# Altium PCB Flow_Pump.PcbDoc (part 1 of 3)
Units mm, origin at the board's own origin, x right, y up, seen from the top; angles counter-clockwise.
Board outline 210 x 210 mm, 2 copper layers (Top Layer, Bottom Layer); 227 components, 178 nets, 654 pads, 724 vias.
Unrouted connection lines stored in the file: 221.
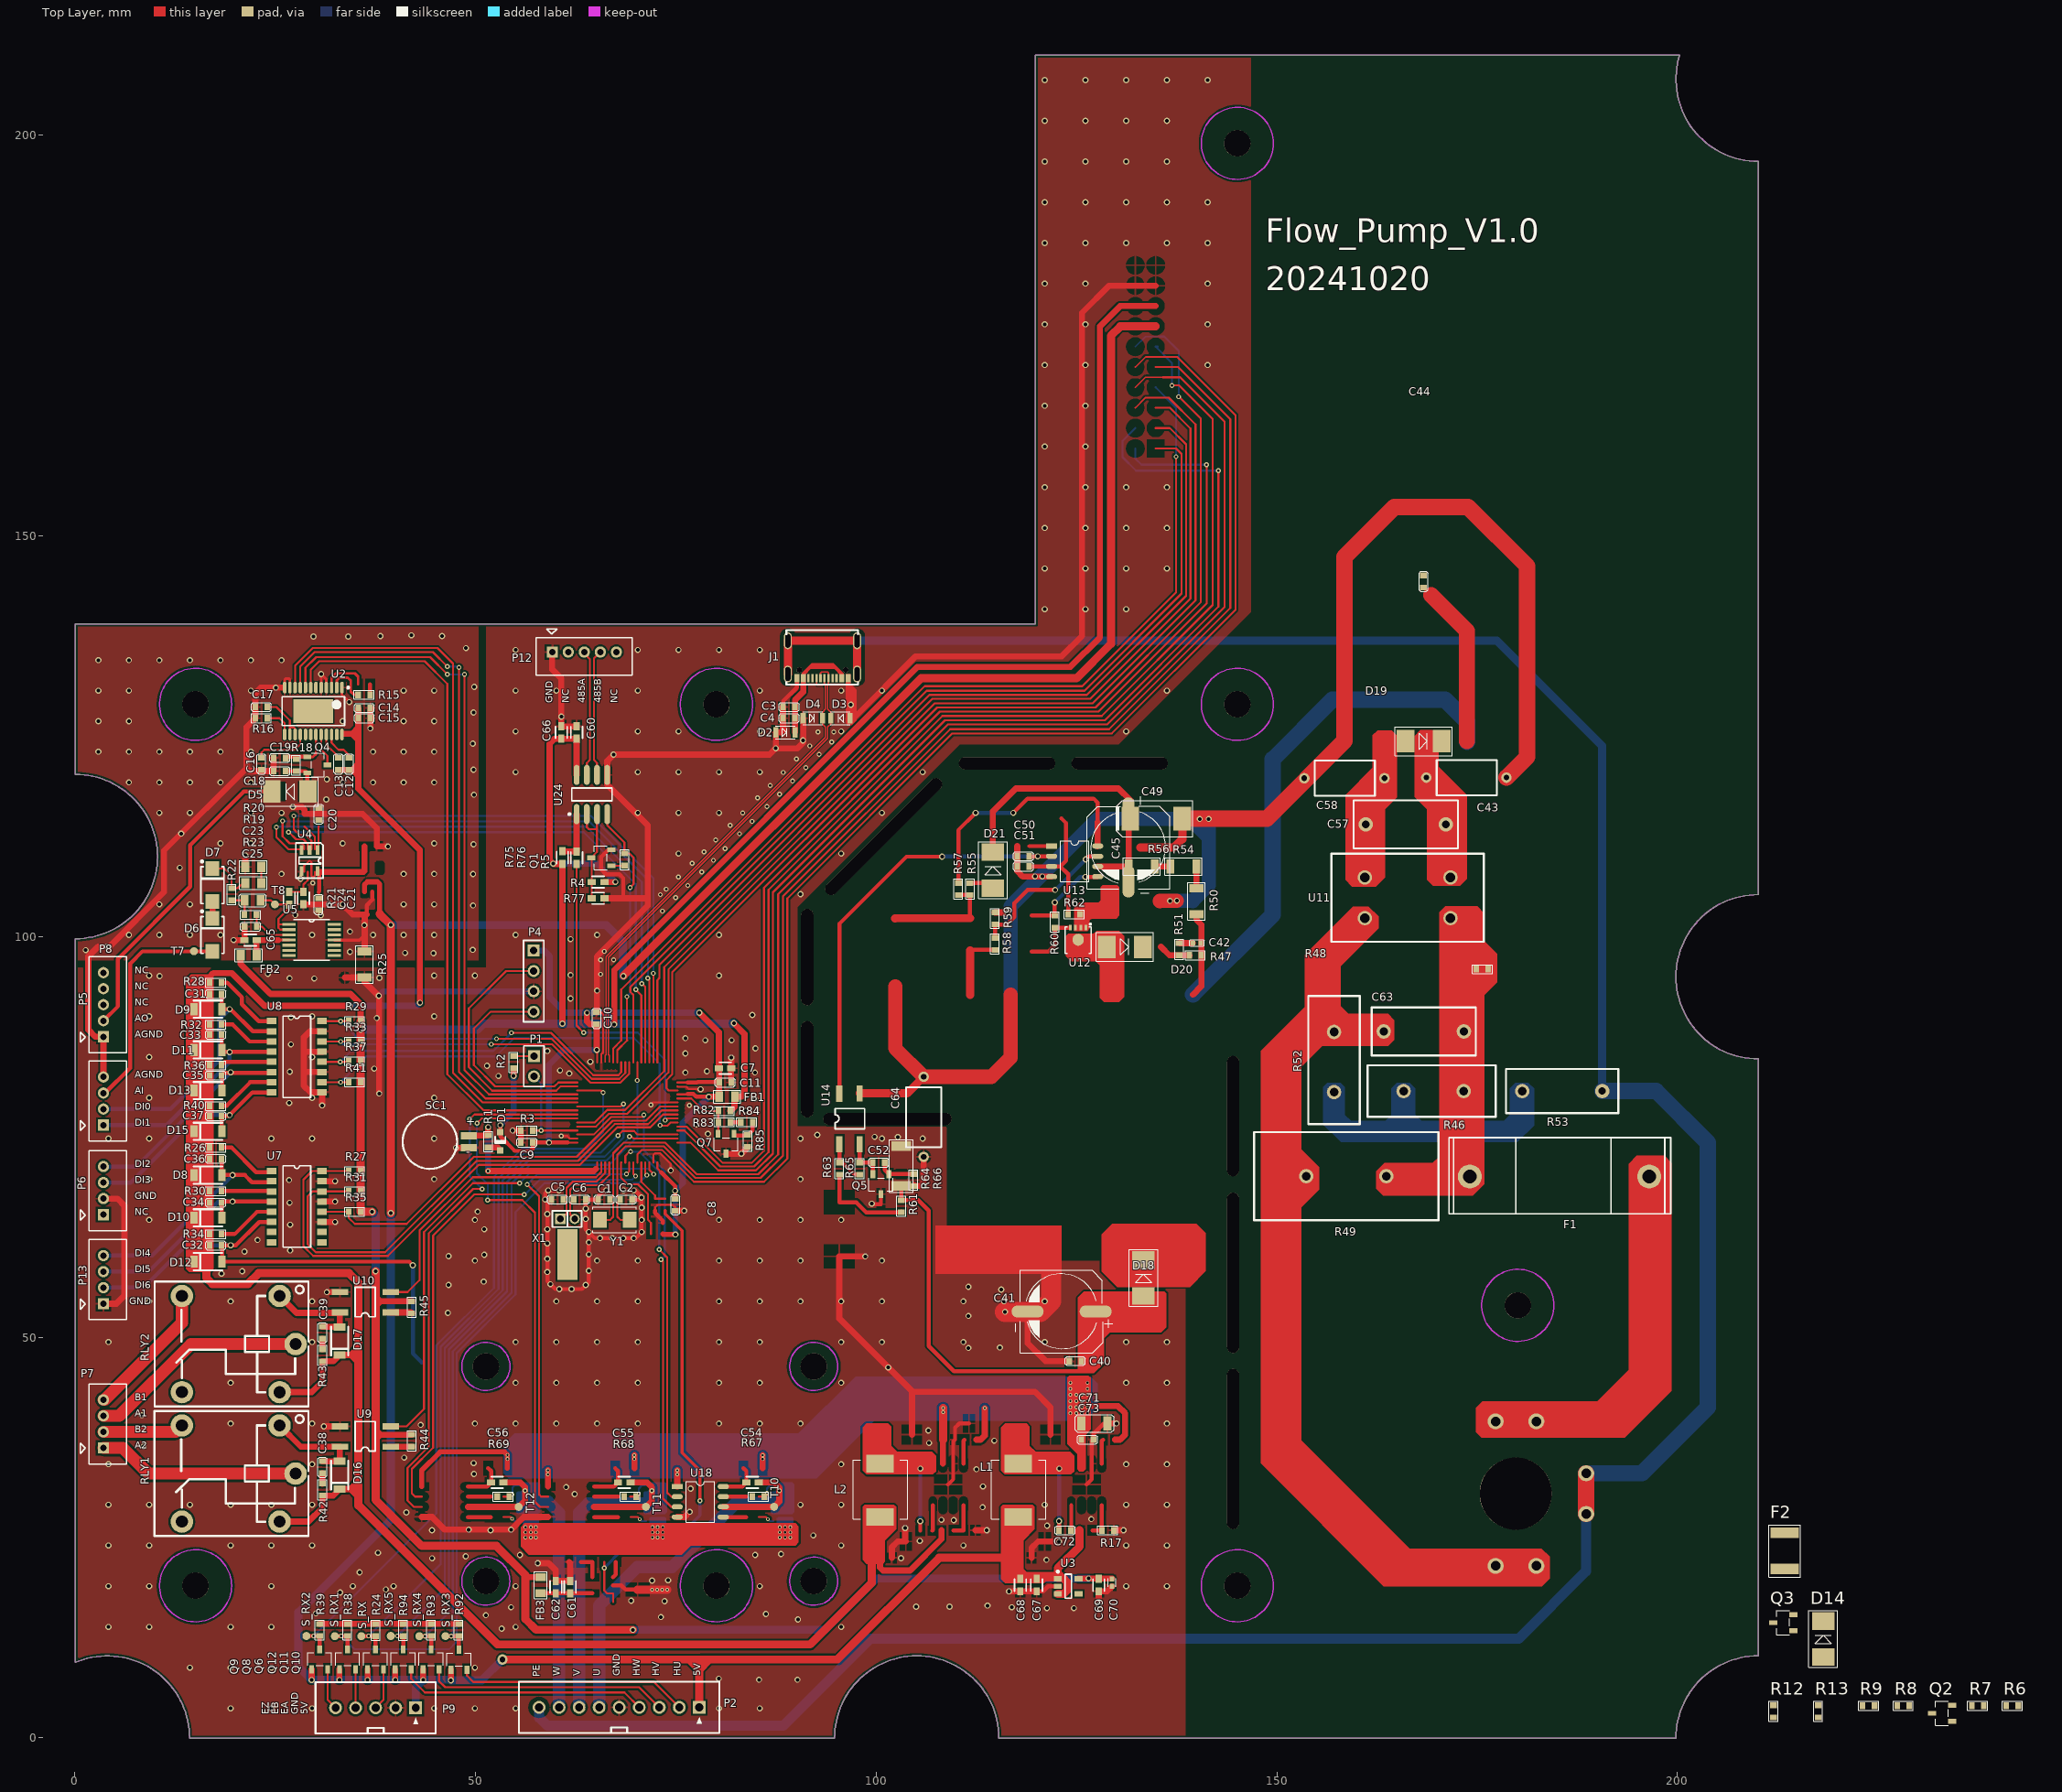
[diagram p0: Top Layer view]
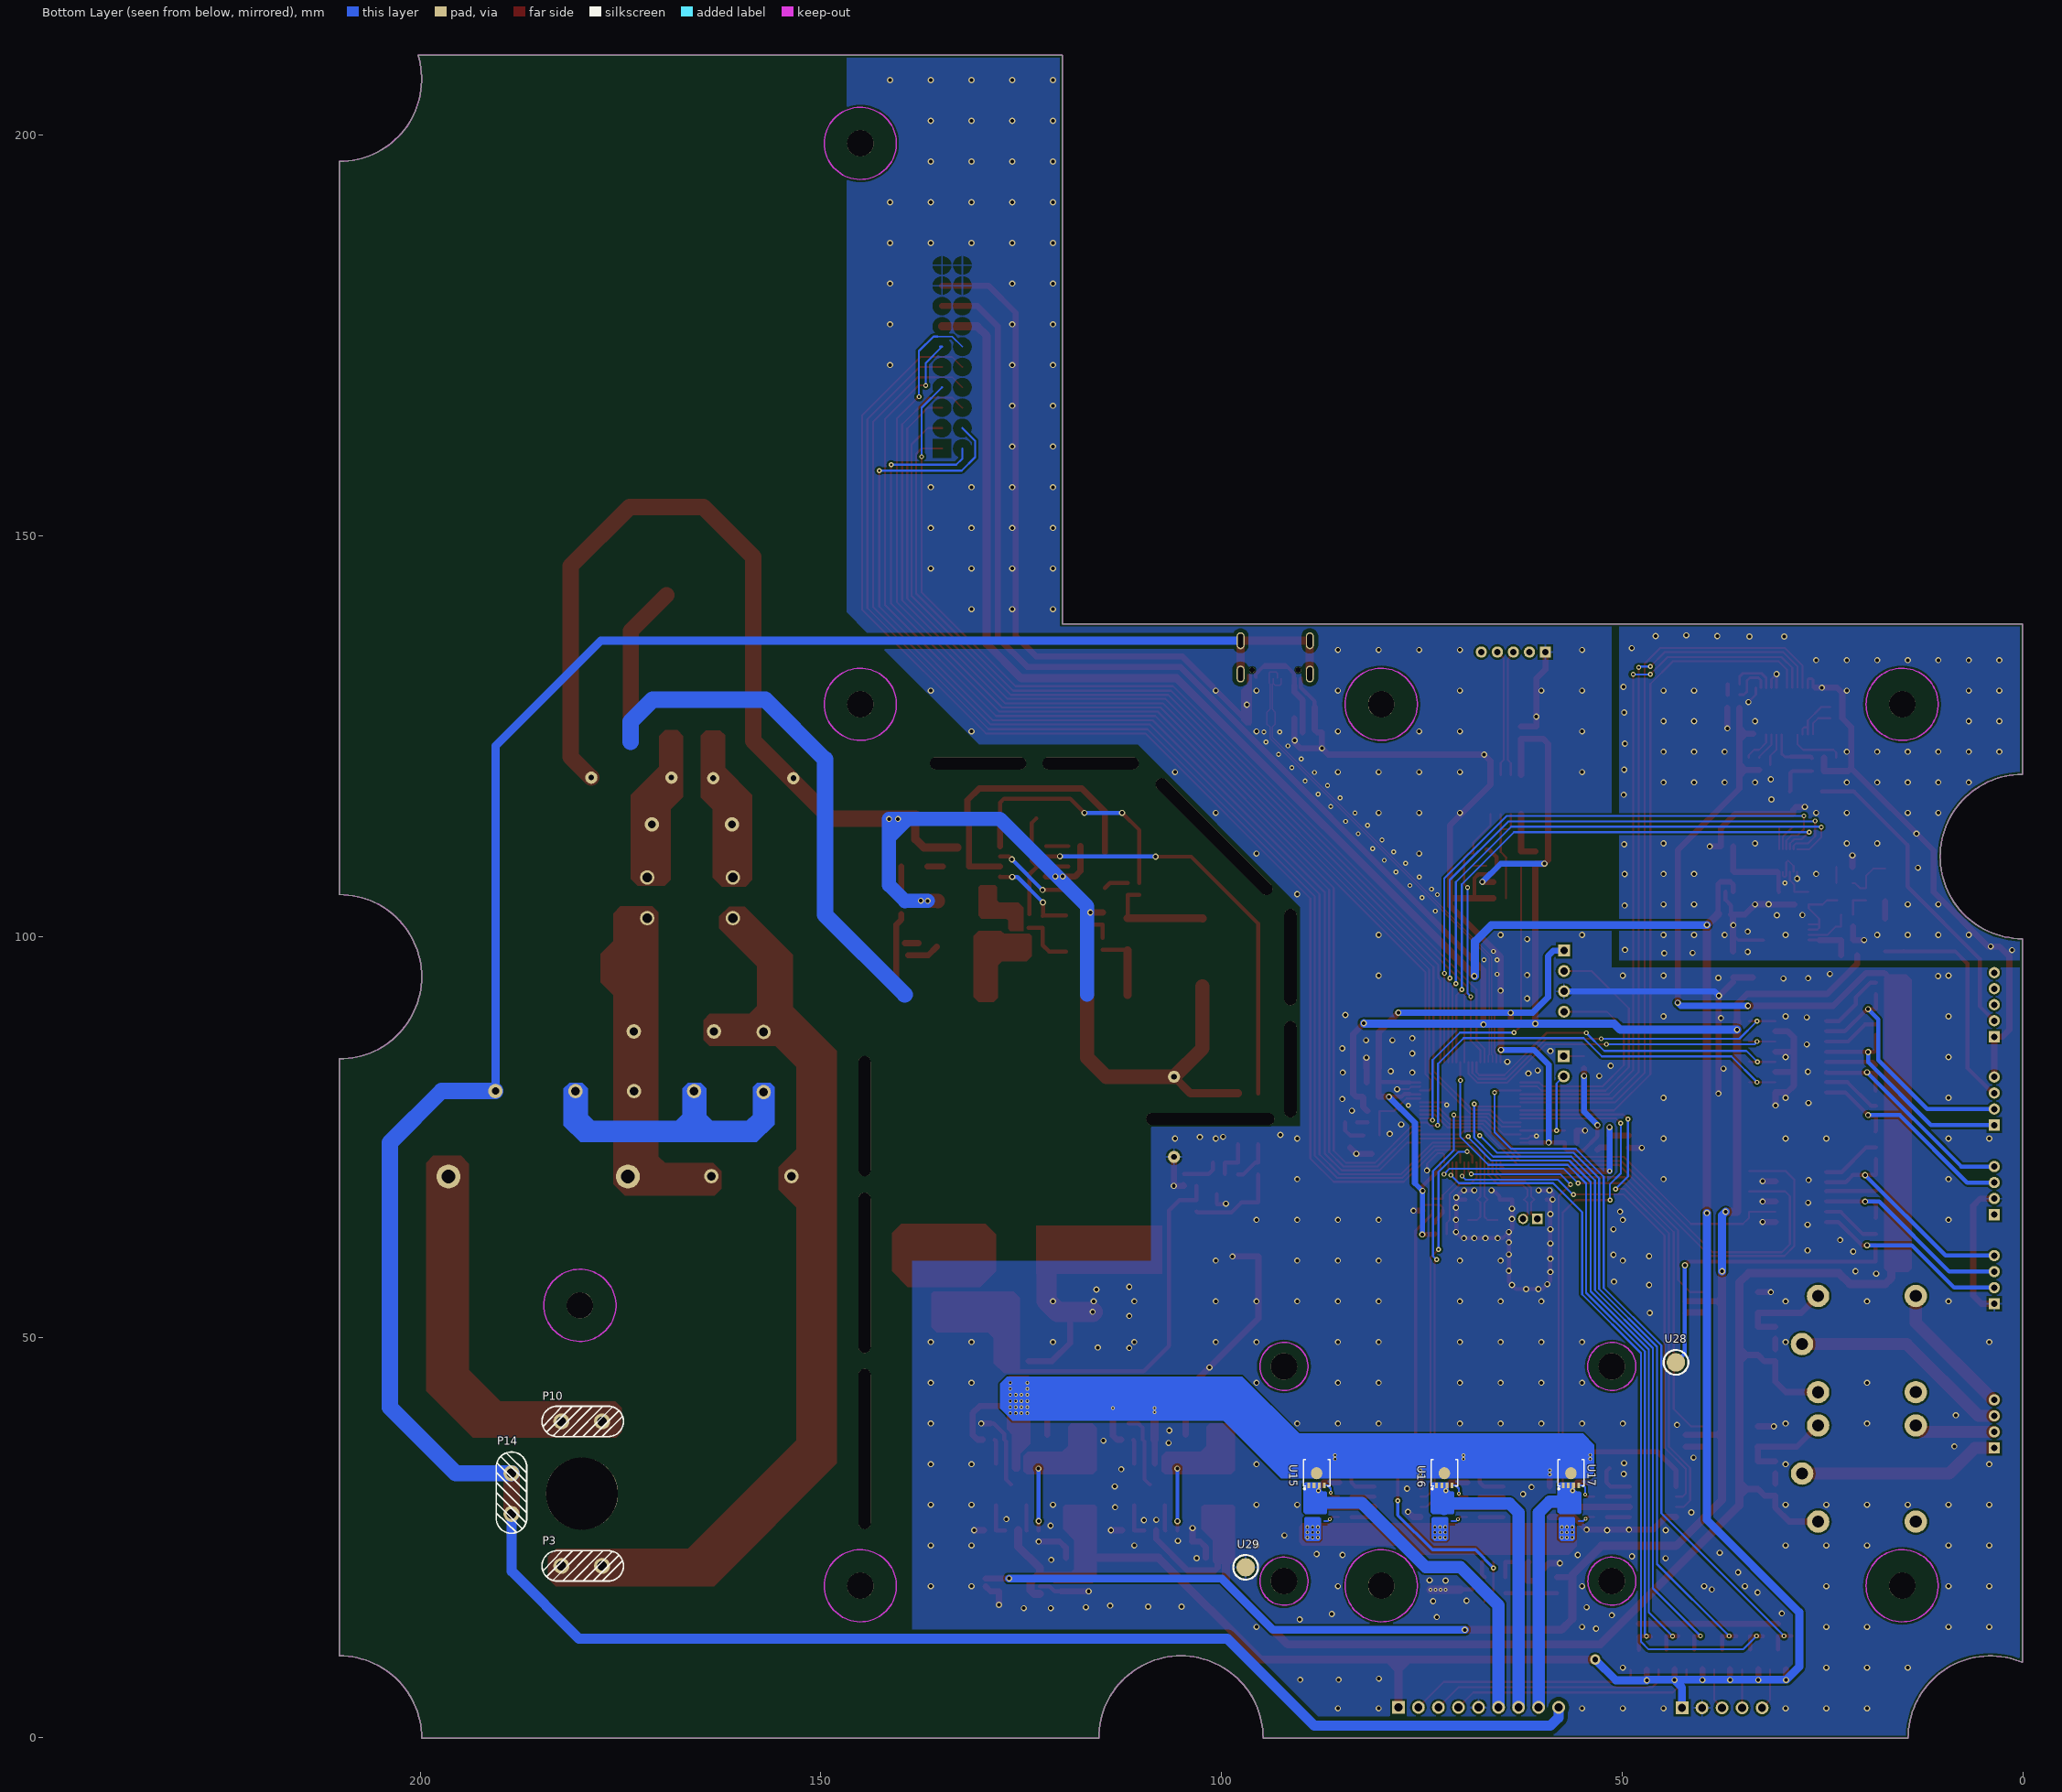
[diagram p1: Bottom Layer view, seen from below]
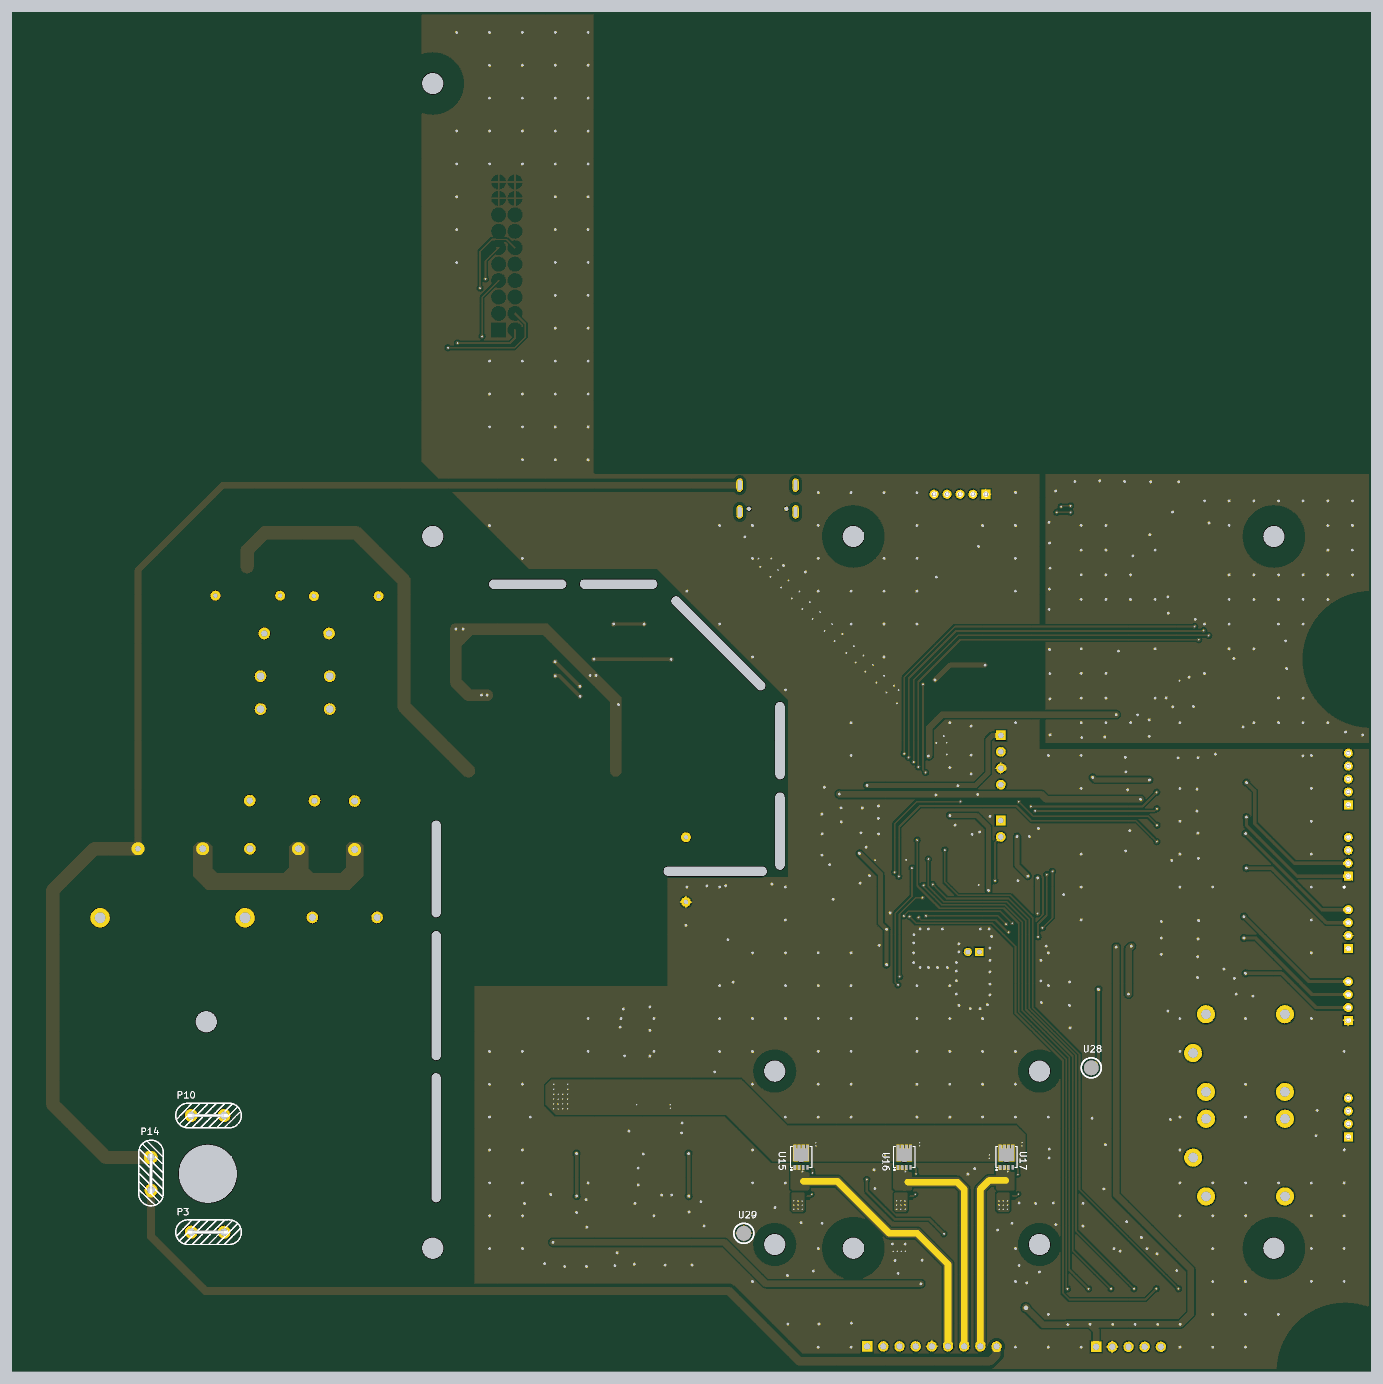
[diagram p4: 3D render of the assembled board from below, using the file's embedded part models]

## Layer stack, top to bottom
Top Solder: solder mask 0.0102, Solder Resist, Dk 3.5
Top Layer: signal copper 0.0356
Dielectric 1: dielectric 0.32, FR-4, Dk 4.8
Bottom Layer: signal copper 0.0356
Bottom Solder: solder mask 0.0102, Solder Resist, Dk 3.5

## Board outline
0.055,9.421 cw(c4.055,-0.016) 14.305,-0.016 94.805,-0.016 cw(c105.055,-0.016) 115.305,-0.016 199.805,-0.016 cw(c210.055,-0.016) 210.055,10.234 210.055,84.734 cw(c210.055,94.984) 210.055,105.234 210.055,196.746 210.055,196.734 cw(c210.055,206.984) 200.254,209.984 200.258,209.984 119.881,209.984 119.881,138.984 0.055,138.984 0.055,120.234 cw(c0.055,109.984) 0.055,99.734

## Design rules (kind name [scope] priority, off if disabled: settings)
Clearance Clearance_2 [InNet('EARTH')] p1: gap=0.508 ignorepadtopadclearanceinfootprint=FALSE except(0: Arc-Hole Track-Hole SMDPad-Hole THPad-Hole Via-Hole Fill-Hole Poly-Hole Region-Hole Text-Hole)
Clearance Clearance_1 [InDifferentialPair('USB') OR InComponent('U1') OR  InComponent('T4') OR  InComponent('U4') OR InComponent('J1') OR InComponent('U2')] p2: gap=0.152 ignorepadtopadclearanceinfootprint=FALSE except(0: Arc-Hole Track-Hole SMDPad-Hole THPad-Hole Via-Hole Fill-Hole Poly-Hole Region-Hole Text-Hole)
Clearance [All] p3: gap=0.254 ignorepadtopadclearanceinfootprint=FALSE except(0: Arc-Hole Track-Hole SMDPad-Hole THPad-Hole Via-Hole Fill-Hole Poly-Hole Region-Hole Text-Hole; 0.152: Arc-Track Track-Track)
DiffPairsRouting [All] p1: maxlimit=0.152 minlimit=0.152 mostfreqgap=0.152 toplayer_minwidth=0.152 toplayer_maxwidth=0.152 toplayer_prefwidth=0.152 bottomlayer_minwidth=0.152 bottomlayer_maxwidth=0.152 bottomlayer_prefwidth=0.152 maxuncoupledlength=12.7
PolygonConnect PolygonConnect_1 [IsVia] p1: connectstyle=Direct reliefconductorwidth=0.254 reliefentries=4 polygonreliefangle="90 Angle" airgapwidth=0.254
PolygonConnect [All] p2: connectstyle=Relief reliefconductorwidth=0.254 reliefentries=4 polygonreliefangle="90 Angle" airgapwidth=0.254
RoutingVias [All] p1: holewidth=0.711 width=1.27 viastyle="Through Hole" minholewidth=0.711 minwidth=1.27 maxholewidth=0.711 maxwidth=1.27
SolderMaskExpansion [All] p1: expansion=0.102 istentingtop=FALSE
Width [All] p1: maxlimit=3.81 minlimit=0.152 preferedwidth=0.254
29 further rules are at their usual default settings.

## Classes and differential pairs
component class ai: C13 C23 C24 C25 C65 D6 D7 FB2 R19 R20 R21 R22 R23 R25 T7 T8 U5 U12
component class ao: C12 Q2 R6 R7 R8 R9 R12 R13 U2 U4 U11
component class blds: C64 C71 C72 C73 Q5 R57 R58 R59 R60 R61 R62 R63 R64 R65 R66 R67 R68 U18
component class DI_DO: C14 C15 C16 C17 C31 C32 C33 C34 C35 C36 C37 C38 C39 C60 C66 D5 D8 D9 D10 D11 D12 D13 D14 D15 D16 D17 D18 D19 D20 D21 FB1 FB3 P5 P6 P7 P8 P12 P13 Q1 Q3 Q4 R4 R5 R15 R16 R17 R18 R26 R27 R28 R29 R30 R31 R32 R33 R34 R35 R36 R37 R40 R41 R42 R43 R44 R45 R46 R47 R48 R49 R50 R75 R76 R77 RLY1 RLY2 U7 U8 U9 U10 U13 U14 U24 U28 U29
component class mcu: C1 C2 C3 C4 C5 C6 C7 C8 C9 C10 C11 C20 C21 D1 D2 D3 D4 J1 P1 P3 P4 R1 R2 R3 R69 SC1 X1 Y1
component class power: C18 C19 C40 C41 C42 C43 C44 C45 C49 C50 C51 C52 C54 C55 C56 C57 C58 C61 C62 C63 C67 C68 C69 C70 F1 F2 L1 L2 P10 P14 Q7 R51 R52 R53 R54 R55 R56 R82 R83 R84 R85 U3 U15 U16 U17
component class sensor: P2 P9 Q6 Q8 Q9 Q10 Q11 Q12 R24 R38 R39 R92 R93 R94 S_RX S_RX1 S_RX2 S_RX3 S_RX4 S_RX5 T10 T11 T12
differential pair rs4853: +rs4853_P -rs4853_N
differential pair rs4852: +rs4852_P -rs4852_N
differential pair rs4851: +rs4851_P -rs4851_N
differential pair USB: +USB_P -USB_N

## Components (designator, comment, footprint, x,y, rotation, side; value= is the part's Value field where it differs from the comment)
C1 "20pF/25V/NC" 0603C 66.788,67.183 r180 top value=20pF/50V/NC
C2 "20pF/25V/NC" 0603C 68.049,67.183 r0 top value=20pF/50V/NC
C3 "1uF/25V" 0603C 88.362,128.651 r0 top value=1u/50V
C4 "0.1uF/50V" 0603C 88.362,127.254 r0 top
C5 "4.7pF" 0603C 60.96,67.183 r180 top value=6.8pF
C6 "4.7pF" 0603C 62.23,67.183 r0 top
C7 "Capacitor_0603" CAPC1608X092N_0603 81.153,83.566 r0 top value=10u
C8 "0.1uF/50V" 0603C 74.93,65.786 r90 top value=22nF
C9 "0.1uF/50V" 0603C 55.65,74.295 r0 top value=22nF
C10 "0.1uF/50V" 0603C 65.1,90.551 r270 top value=22nF
C11 "0.1uF/50V" 0603C 81.891,81.788 r180 top value=22nF
C12 "Capacitor_0603" 0603C 34.195,122.301 r270 top value=0.1u
C13 "Capacitor_0603" 0603C 32.884,122.301 r270 top value=0.1u
C14 "Capacitor_0603" 0603C 36.862,128.524 r180 top value=0.1u
C15 "Capacitor_0603" 0603C 36.862,127.254 r180 top value=0.1u
C16 "Capacitor_0603" 0603C 23.273,122.301 r270 top value=0.1u
C17 "Capacitor_0603" 0603C 24.011,128.651 r180 top value=0.1u
C18 "0.1uF/50V" 0603C 24.808,120.65 r0 top
C19 "47uF/25V" 0603C 24.808,122.301 r0 top
C20 "2.2uF/50V" 0603C 30.421,114.538 r90 top
C21 "0.1uF/50V" 0603C 30.403,104.775 r270 top
C23 "220nF" 0805C 21.182,104.518 r0 top
C24 "Capacitor_0603" CAPC1608X092N_0603 28.516,104.775 r270 top value=0.1u
C25 "0.1uF" 0603C 21.174,101.242 r0 top
C31 "10nF/50V" 0603C 16.804,92.837 r0 top value=22nF
C32 "10nF/50V" 0603C 16.804,61.468 r0 top value=22nF
C33 "10nF/50V" 0603C 16.804,87.757 r0 top value=22nF
C34 "10nF/50V" 0603C 16.804,66.802 r0 top value=22nF
C35 "10nF/50V" 0603C 16.804,82.677 r0 top value=22nF
C36 "10nF/50V" 0603C 16.804,72.263 r0 top value=22nF
C37 "10nF/50V" 0603C 16.804,77.597 r0 top value=22nF
C38 "0.1uF" 0603C 30.881,34.525 r270 top
C39 "0.1uF" 0603C 30.881,51.313 r270 top
C40 "0.01uF/50V" 0603c 125.577,47.027 r180 top value=0.01u/NC
C41 "0.1uF/50V" Φ10×10 123.133,53.213 r270 top
C42 "0.1uF/50V" 0402c 140.511,99.187 r180 top
C43 "1uF/50V" CAP-TH_L7.5-W4.5-P10.00-D0.6 173.634,119.837 r180 top
C44 "Capacitor_0603" 0603c 168.3,143.561 r90 top
C45 "UUD1V470MCL1GS" Φ10×10 131.469,111.125 r0 top value=220uF/50V
C49 "0.1uF/50V" 7343 131.697,114.718 r0 top
C50 "10u/50V" 0603c 119.1,110.019 r180 top
C51 "47uF/25V" 0603c 119.1,108.749 r180 top
C52 "47uF/25V" 0603c 99.566,71.792 r0 top
C54 "47uF/25V" CAPC1608X092N_0603 84.551,31.882 r180 top
C55 "0.01uF/50V" CAPC1608X092N_0603 68.535,31.882 r180 top value=0.01u/NC
C56 "0.1uF/50V" CAPC1608X092N_0603 52.7,31.882 r180 top
C57 "1uF/50V" CAP-TH_L13.0-W6.0-P10.00-D0.6 166.08,113.991 r0 top
C58 "0.1uF/50V" CAP-TH_L7.5-W4.5-P10.00-D0.6 158.42,119.761 r180 top
C60 "Capacitor_0603" CAPC1608X092N_0603 62.611,125.476 r90 top value=0.1u
C61 "10u/50V" CAPC1608X092N_0603 61.794,18.826 r90 top
C62 "0.1uF/50V" CAPC1608X092N_0603 60.016,18.826 r90 top
C63 "22u/25V" CAP-TH_L13.0-W6.0-P10.00-D0.6 168.33,88.163 r0 top
C64 "22nF/50V" CAP-TH_L7.5-W4.5-P10.00-D0.6 105.918,77.502 r90 top value=4.7pF
C65 "Capacitor_0603" CAPC1608X092N_0603 21.887,99.552 r180 top value=0.1u
C66 "Capacitor_0603" CAPC1608X092N_0603 60.706,125.476 r90 top value=0.1u
C67 "Capacitor_0603" CAPC1608X092N_0603 120.015,19.05 r270 top value=0.1u
C68 "Capacitor_0603" CAPC1608X092N_0603 117.983,19.05 r270 top value=10u
C69 "Capacitor_0603" CAPC1608X092N_0603 127.762,19.05 r270 top value=10u
C70 "Capacitor_0402" CAPC1005X056N_0402 129.413,19.381 r270 top value=0.1u
C71 "1uF/50V" 1206C 125.603,39.253 r0 top value=4.7pF
C72 "1uF/50V" 0603C 122.809,25.908 r0 top value=4.7pF
C73 "1uF/50V" 0603C 127.103,37.221 r180 top value=4.7pF
D1 "BZT52C12S-7-F" DIOD-SOD323-2_V 53.086,74.461 r270 top
D2 "CESDB5V0D3" SOD323 87.462,125.476 r0 top
D3 "CESDB5V0D3" SOD323 96.72,127.254 r180 top
D4 "CESDB5V0D3" SOD323 90.881,127.254 r0 top value=0.1uF/50V
D5 "SMBJ400CA" SMB 29.083,118.11 r180 top
D6 "SS14" DO-214AC 17.166,100.203 r90 top
D7 "SS14" DO-214AC 17.166,106.426 r90 top
D8 "LL4148" DO-213AB/LL34/MiniMELF 16.602,70.231 r0 top
D9 "LL4148" DO-213AB/LL34/MiniMELF 16.602,90.932 r0 top
D10 "LL4148" DO-213AB/LL34/MiniMELF 16.602,64.897 r0 top
D11 "LL4148" DO-213AB/LL34/MiniMELF 16.602,85.852 r0 top
D12 "LL4148" DO-213AB/LL34/MiniMELF 16.602,59.436 r0 top
D13 "LL4148" DO-213AB/LL34/MiniMELF 16.602,80.772 r0 top
D14 "SMBJ400CA" SMB 218.186,10.084 r90 top
D15 "LL4148" DO-213AB/LL34/MiniMELF 16.602,75.692 r0 top
D16 "LL4148" DO-213AB/LL34/MiniMELF 33.04,32.799 r90 top
D17 "LL4148" DO-213AB/LL34/MiniMELF 33.04,49.535 r90 top
D18 "SMBJ400CA" SMB 133.35,55.146 r90 top
D19 "SMBJ400CA" SMB 166.055,124.384 r0 top
D20 "SMBJ400CA" SMB 128.776,98.716 r0 top
D21 "SMBJ400CA" SMB 114.554,106.045 r90 top
F1 "BH16-800" 可视开关电源保险丝座 196.466,70.053 r180 top value=BSMD1812-110-24V
F2 "BSMD1812-110-24V" 1812-F 213.36,21.082 r90 top
FB1 "PE-0603PFB121ST" 0805R 82.391,80.01 r180 top
FB2 "JWWBW2012 M600HT" 0805R 20.674,97.662 r0 top
FB3 "PE-0603PFB121ST" 0805R 58.111,20.064 r270 top
J1 "TYPE C_16P" TYPEC_16P 93.291,136.525 r180 top
L1 "SMMS0420-100M" IND-SMD-L7.3-W6 117.729,34.223 r270 top
L2 "SMMS0420-100M" IND-SMD-L7.3-W6 100.457,34.223 r270 top
P1 "Header 2" HDR1X2 57.277,85.09 r270 top
P2 "Header 9" XA2.5-9P 67.92,3.81 r0 top
P3 "Header 10X2" 插片端子4.8*0.8mm 182.372,21.463 r180 bottom locked
P4 "Header 4" HDR1X4 57.252,98.247 r270 top
P5 "Header 4" CONN#PH2.0-4A 3.556,76.477 r0 top
P6 "Header 4" CONN#PH2.0-4A 3.556,65.301 r0 top
P7 "Header 4" CONN#PH2.0-4A 3.556,36.186 r0 top
P8 "Header 5" CONN#PH2.0-5A 3.556,87.494 r0 top
P9 "Header 5" XA2.5-5P 37.527,3.75 r0 top
P10 "Header 2" 插片端子4.8*0.8mm 182.372,39.497 r180 bottom locked
P12 "Header 5" CONN#PH2.0-5A 59.564,135.509 r270 top
P13 "Header 4" CONN#PH2.0-4A 3.556,54.189 r0 top
P14 "Header 2" 插片端子4.8*0.8mm 188.595,27.94 r90 bottom locked
Q1 "MMBT3904" SOT23-3 66.929,108.842 r0 top
Q2 "S8050" SOT23-3 234.264,2.083 r0 top
Q3 "MMBT3904" SOT23-3 214.452,13.386 r0 top
Q4 "MMBT3904" SOT23-3 28.999,122.428 r180 top
Q5 "AGM609MNA" SOT23-3 101.582,70.355 r90 top
Q6 "SI2306" SOT23-3 36.516,8.543 r270 top
Q7 "" SOT23-3 82.255,75.398 r90 top
Q8 "SI2306" SOT23-3 33.01,8.543 r270 top
Q9 "SI2306" SOT23-3 29.531,8.543 r270 top
Q10 "SI2306" SOT23-3 46.914,8.503 r270 top
Q11 "SI2306" SOT23-3 43.45,8.543 r270 top
Q12 "SI2306" SOT23-3 39.968,8.543 r270 top
R1 "1K" 0603R 51.562,73.684 r90 top
R2 "10K" 0603R 54.737,83.565 r90 top value=10k/1%
R3 "100K" 0603R 57.15,75.795 r180 top value=10k/1%
R4 "Resistor_0603" RESC1608X055N_0603 65.278,106.807 r0 top value=10k
R5 "1K" 0603r 68.58,110.363 r270 top
R6 "100K" 0603R 241.021,4.013 r0 top
R7 "100K" 0603R 236.703,4.013 r0 top
R8 "1K" 0603R 227.406,4.013 r0 top
R9 "100" 0603R 223.088,4.013 r0 top
R12 "100K" 0603R 211.963,2.565 r90 top
R13 "200K" 0603R 217.551,2.565 r90 top
R15 "Resistor_0603" 0603R 35.33,130.175 r0 top value=10k
R16 "Resistor_0603" 0603R 24.011,127.254 r180 top value=10k
R17 "Resistor_0603" 0603R 128.143,25.908 r0 top value=10k
R18 "Resistor_0603" 0603R 27.602,122.15 r270 top value=100
R19 "0R_1%" 0805R 23.269,106.664 r180 top
R20 "49.9R_1%" 0805R 21.269,108.696 r0 top
R21 "Resistor_0603" RESC1608X055N_0603 26.738,104.775 r90 top value=10k
R22 "51K" 0603R 19.558,104.521 r90 top
R23 "51K" 0603R 22.65,102.729 r180 top
R24 "10K" 0603R 37.516,14.194 r270 top value=10R
R25 "0" 1206R 36.144,94.903 r90 top
R26 "3.3K" 0603R 18.304,73.66 r180 top
R27 "5.1K" 0603R 35.652,70.739 r180 top
R28 "3.3K" 0603R 18.304,94.234 r180 top
R29 "5.1K" 0603R 35.652,89.445 r180 top
R30 "3.3K" 0603R 18.304,68.236 r180 top
R31 "5.1K" 0603R 35.652,68.199 r180 top
R32 "3.3K" 0603R 18.304,89.027 r180 top
R33 "5.1K" 0603R 35.652,86.905 r180 top
R34 "3.3K" 0603R 18.304,62.865 r180 top
R35 "5.1K" 0603R 35.65,65.659 r180 top
R36 "3.3K" 0603R 18.304,83.947 r180 top
R37 "5.1K" 0603R 35.652,84.455 r180 top
R38 "10K" 0603R 34.01,14.218 r270 top value=10R
R39 "10K" 0603R 30.531,14.218 r270 top value=10R
R40 "3.3K" 0603R 18.304,78.867 r180 top
R41 "5.1K" 0603R 35.652,81.825 r180 top
R42 "51K" 0603R 30.881,31.731 r270 top
R43 "51K" 0603R 30.881,48.495 r270 top
R44 "510" 0603R 42.037,36.327 r90 top
R45 "510" 0603R 42.037,52.983 r90 top
R46 "Resistor_0603" 14D561K 165.804,80.721 r0 top value=100
R47 "1K" 0603R 139.065,97.663 r0 top
R48 "1K" 0603r 176.378,95.936 r180 top
R49 "Resistor_0603" 20D471K 153.652,70.104 r0 top value=10k
R50 "Resistor_0603" 1206R 139.952,106.03 r270 top value=10k
R51 "100k/1%" 0603R 137.795,97.663 r90 top
R52 "4.3k/1%" 14D561K 157.124,88.094 r270 top
R53 "100k/1%" B5G3600 190.602,80.721 r180 top
R54 "24.9k/1%" 1206R 136.702,108.749 r0 top
R55 "33k/1%" 0603R 111.711,105.18 r90 top
R56 "10k/1%" 1206R 131.495,108.749 r0 top
R57 "" 0603R 110.234,105.193 r90 top value=10K/1%
R58 "" 0603R 114.806,98.335 r90 top value=10K/1%
R59 "" 0603R 114.806,101.51 r90 top value=10K/1%
R60 "" 0603R 122.301,101.092 r90 top value=10K/1%
R61 "0" 0603R 103.124,67.107 r270 top
R62 "0" 0603R 125.452,102.78 r180 top
R63 "0" 0603R 95.391,70.292 r90 top
R64 "0.05" 2010R 103.122,68.871 r90 top
R65 "" 0603R 97.931,70.292 r90 top value=10K/1%
R66 "" 0603R 104.646,70.371 r270 top value=10K/1%
R67 "0" 0603R 84.551,30.104 r0 top
R68 "0" 0603R 68.535,30.104 r0 top
R69 "10K" 0603R 52.7,30.104 r0 top value=10k/1%
R75 "Resistor_0603" RESC1608X055N_0603 60.833,109.855 r270 top value=10k
R76 "Resistor_0603" RESC1608X055N_0603 62.611,109.83 r270 top value=100
R77 "Resistor_0603" RESC1608X055N_0603 65.278,104.775 r180 top value=10k
R82 "100/0.1%" 0603R 81.788,78.232 r180 top
R83 "1K/0.1%" 0603R 80.288,76.835 r0 top value=20K/0.1%
R84 "1K/0.1%" 0603R 83.082,76.835 r0 top value=200/0.1%
R85 "1K/0.1%" 0603R 83.947,75.236 r270 top value=20K/0.1%
R92 "10K" 0603R 47.875,14.218 r270 top value=10R
R93 "10K" 0603R 44.45,14.218 r270 top value=10R
R94 "10K" 0603R 40.968,14.194 r270 top value=10R
RLY1 "SRD-05VDC-SL-C" RELAY-TH_SRD-XXVDC-XL-C 20.435,32.99 r180 top
RLY2 "SRD-05VDC-SL-C" RELAY-TH_SRD-XXVDC-XL-C 20.447,49.149 r180 top
S_RX "TP" TPD#1 35.738,12.694 r90 top
S_RX1 "TP" TPD#1 32.436,12.694 r90 top
S_RX2 "TP" TPD#1 28.88,12.718 r90 top
S_RX3 "TP" TPD#1 46.228,12.7 r90 top
S_RX4 "TP" TPD#1 42.977,12.694 r90 top
S_RX5 "TP" TPD#1 39.418,12.718 r90 top
SC1 "1.5F/5.5V" CAP-TH_DMS3R3224 49.148,74.409 r0 top value=100pF
T7 "TP" TPD#1 14.859,98.171 r270 top
T8 "TP" TPD#1 24.96,104.013 r270 top
T10 "TP" TPD#1 87.249,28.834 r180 top
T11 "TP" TPD#1 71.252,28.834 r180 top
T12 "TP" TPD#2 55.753,28.829 r180 top
U2 "DAC8551IADGKR" AD5410AREZ-REEL7 29.75,128.143 r270 top
U3 "ME6119A33M5G" MCRN-SOT23-5_V 123.952,18.923 r0 top
U4 "AD8615AUJZ-R2" sot-23-5 29.278,109.474 r270 top
U5 "TLV2454IPW" TSSOP14 29.532,99.567 r0 top
U7 "TLP291-4" SOP16-T 24.542,70.739 r0 top
U8 "TLP291-4" SOP16-T 24.542,89.445 r0 top
U9 "AQY210S" sop4 39.418,36.327 r180 top
U10 "AQY210S" sop4 39.418,53.091 r180 top
U11 "TL071HIDBVR" TY-100P 171.668,102.307 r180 top
U12 "ADS1118IDGSR" DFN-8_L3.3-W3.3-P0.65-BL-2 125.196,100.37 r180 top
U13 "THVD1400" so-8 121.883,111.289 r0 top value=MAX33071EASA+
U14 "THVD1400" sop4 95.391,74.078 r90 top value=MAX33071EASA+
U15 "LMR36520FADDAR" DFN-8_L3.3-W3.3-P0.65-BL-2 88.12,32.261 r180 bottom
U16 "LMR36520FADDAR" DFN-8_L3.3-W3.3-P0.65-BL-2 72.177,32.261 r180 bottom
U17 "TPS562201DDCR" DFN-8_L3.3-W3.3-P0.65-BL-2 56.388,32.261 r180 bottom
U18 "DRV8306HRSMR" SO-8 75.159,31.374 r0 top
U24 "THVD1400" MAXM-S8+4_M 64.516,117.729 r90 top value=MAX33071EASA+
U28 "YTC1P-3015-01" CONN-SMD_YTC1P-3015-01 43.282,46.863 r180 bottom
U29 "YTC1P-3015-01" CONN-SMD_YTC1P-3015-01 96.977,21.285 r180 bottom
X1 "32768" A 60.579,64.77 r0 top
Y1 "8M" CRAY_5032 65.509,64.643 r0 top

## Footprints (in the part's own frame and the unit in brackets; to place one, negate y for a bottom-side part, rotate by r counter-clockwise, add the part's x,y. Pads: shape width x height; smd on the part's side, far side on the other; paste and mask are expansions set on the pad)
14D561K [mm]
  round 1.8 hole 1.1: 1(0,0) 2(7.5,0)
  silkscreen extent -4.5,-3.21 11.5,3.21
20D471K [mm]
  round 1.8 hole 1.1: 1(0,0) 2(10,0)
  silkscreen extent -6.5,-5.5 16.5,5.5
0402c [mm]
  rect 0.6x0.6 smd: 1(0,0) 2(1,0)
  silkscreen extent -0.4,-0.4 1.4,0.4
0603C [mm]
  rect 0.7x0.85 smd: 1(0,0) 2(1.5,0)
  silkscreen extent -0.5,-0.55 2,0.55
0603c [mm]
  rect 0.7x0.85 smd: 1(0,0) 2(1.5,0)
  silkscreen extent -0.5,-0.55 2,0.55
0603R [mm]
  rect 0.7x0.85 smd: 1(0,0) 2(1.5,0)
  silkscreen extent -0.5,-0.55 2,0.55
0603r [mm]
  rect 0.7x0.85 smd: 1(0,0) 2(1.5,0)
  silkscreen extent -0.5,-0.55 2,0.55
0805C [mm]
  rect 1x1.3 smd: 1(0,0) 2(2,0)
  silkscreen extent -0.7,-0.8 2.7,0.8
0805R [mm]
  rect 1x1.3 smd: 1(0,0) 2(2,0)
  silkscreen extent -0.7,-0.8 2.7,0.8
1206C [mm]
  rect 1x1.8 smd: 1(0,0) 2(3.25,0)
  silkscreen extent -0.8,-1.1 4.05,1.1
1206R [mm]
  rect 1x1.8 smd: 1(0,0) 2(3.25,0)
  silkscreen extent -0.7,-1.1 3.95,1.1
1812-F [mm]
  rect 1.3x3.5 smd: 1(0,0) 2(4.5,0)
  silkscreen extent -1,-1.95 5.5,1.95
2010R [mm]
  rect 1.2x2.5 smd: 1(0,0) 2(5,0)
  silkscreen extent -0.8,-1.5 5.8,1.5
7343 [mm]
  rect 2.2x3 smd: 1(0,0) 2(6.5,0)
  silkscreen extent -1.75,-2.25 7.8,2.25
A [mil]
  round 50 hole 32: 1(70,0)
  rect 50x50 hole 32: 2(0,0)
  rect 100x250 smd: 3(34.37,-175)
  silkscreen extent -40,-40 105,40
AD5410AREZ-REEL7 [mm] "SOP, 24-Leads, Body 7.8x4.4mm (max), Pitch 0.65mm, IPC Medium Density"
  oval 1.45x0.45 smd: 1(-2.925,3.575) 2(-2.925,2.925) 3(-2.925,2.275) 4(-2.925,1.625) 5(-2.925,0.975) 6(-2.925,0.325) 7(-2.925,-0.325) 8(-2.925,-0.975) 9(-2.925,-1.625) 10(-2.925,-2.275) 11(-2.925,-2.925) 12(-2.925,-3.575) 13(2.925,-3.575) 14(2.925,-2.925) 15(2.925,-2.275) 16(2.925,-1.625) 17(2.925,-0.975) 18(2.925,-0.325) 19(2.925,0.325) 20(2.925,0.975) 21(2.925,1.625) 22(2.925,2.275) 23(2.925,2.925) 24(2.925,3.575)
  rect 3x5 smd: 25(0,0)
  silkscreen extent -3.05,-3.9 1.8,4.47, body extent -2.2,-3.9 2.2,3.9, height 2.65
B5G3600 [mm]
  round 1.8 hole 0.9: 1(0,0)
  round 1.8 hole 1.1: 2(10,0)
  silkscreen extent -2,-2.75 12,2.75
CAP-TH_DMS3R3224 [mm]
  rect 2x0.9 smd: 1(-0.001,0.749) 2(0.001,-0.749)
  silkscreen extent -8.26,-3.4 -1.46,3.4
CAP-TH_L7.5-W4.5-P10.00-D0.6 [mm]
  round 1.3 / inner round 1.524 / far side round 1.524 hole 0.7: 1(-5,0) 2(5,0)
  silkscreen extent -3.8,-2.2 3.7,2.2
CAP-TH_L13.0-W6.0-P10.00-D0.6 [mm]
  round 1.8 hole 1: 1(-5,0) 2(5,0)
  silkscreen extent -6.5,-3 6.5,3
CAPC1005X056N_0402 [mil] "Chip Capacitor, 0402"
  round 10 on Mech3: 0(0,0)
  rect 25x24 smd mask+1.97: 1(-18.03,0) 2(18.03,0)
  silkscreen extent -20,-20 20,20, body extent -20,-10 20,10, height 22
CAPC1608X092N_0603 [mil] "Chip Capacitor, 0603"
  round 10 on Mech3: 0(0,0)
  rect 40x30 smd: 1(-30.98,0) 2(30,0)
  silkscreen extent -30,-29 30,29, body extent -31,-16 31,16, height 36
CONN#PH2.0-4A [mm]
  rect 1.4x1.4 / inner round 1.2 / far side rect 1.4x1.4 hole 0.8: 1(0,0)
  round 1.4 / inner round 1.2 / far side round 1.4 hole 0.8: 2(0,2) 3(0,4) 4(0,6)
  silkscreen extent -2.9,-2 2.9,8, body extent -1.7,-1.95 3,7.95, height 6.01
CONN#PH2.0-5A [mm]
  rect 1.4x1.4 / inner round 1.2 / far side rect 1.4x1.4 hole 0.8: 1(0,0)
  round 1.4 / inner round 1.2 / far side round 1.4 hole 0.8: 2(0,2) 3(0,4) 4(0,6) 5(0,8)
  silkscreen extent -2.9,-2 2.9,10, body extent -1.7,-1.95 3,9.95, height 6.01
CONN-SMD_YTC1P-3015-01 [mm]
  round 2.3 smd paste+0 mask+0.05: 1(0,0)
  silkscreen extent -1.55,-1.54 1.54,1.54
CRAY_5032 [mm]
  rect 1.7x2 smd: 1(0,0) 2(3.7,0)
  silkscreen extent -0.86,-1.6 4.55,1.6
DFN-8_L3.3-W3.3-P0.65-BL-2 [mm]
  rect 0.35x0.7 smd paste-100 mask+0.051: 1(-0.975,-0.765) 2(-0.325,-0.765) 3(0.325,-0.765) 4(0.975,-0.765)
  oval 1.411x1.499 smd: 5(0,0.765)
  Top Layer region: -1.176,0.187 -1.176,2.115 -1.176,2.685 -0.775,2.685 -0.775,2.115 -0.526,2.115 -0.526,2.685 -0.125,2.685 -0.125,2.115 0.125,2.115 0.125,2.685 0.525,2.685 0.525,2.115 0.774,2.115 0.774,2.685 0.774,2.115 0.774,2.685 1.176,2.685 1.176,2.115 1.176,0.187 -1.176,0.187
  silkscreen extent -1.65,-1.28 1.65,2.48
DIOD-SOD323-2_V [mm] "SOD-323, 2-Leads, Body 1.7x1.3mm, Lead Span 2.5mm"
  rect 0.8x0.8 smd: 1(-1.125,0) 2(1.125,0)
  silkscreen extent -0.56,-0.65 0.26,0.65, body extent -1.21,-0.65 1.31,0.65, height 1.13
DO-213AB/LL34/MiniMELF [mm]
  rect 0.9x1.5 smd: 1(1.75,0) 2(-1.75,0)
  silkscreen extent -1.8,-1.08 1.8,1.08
DO-214AC [mm] "Molded Diode, 2-Leads, Body 4.3x2.7mm, IPC Medium Density"
  rect 1.85x1.7 smd: 1(-2.05,0) 2(2.05,0)
  silkscreen extent -2.3,-1.45 3.07,1.45, body extent -2.3,-1.45 2.3,1.45, height 2.44
HDR1X2 [mm] "Connector; Header; 2 Position"
  rect 1.5x1.5 hole 0.9: 1(0,0)
  round 1.5 hole 0.9: 2(2.54,0)
  silkscreen extent -1.27,-1.27 3.81,1.27
HDR1X4 [mm] "Connector; Header; 4 Position"
  rect 1.5x1.5 hole 0.9: 1(0,0)
  round 1.5 hole 0.9: 2(2.54,0) 3(5.08,0) 4(7.62,0)
  silkscreen extent -1.27,-1.27 8.89,1.27
IND-SMD-L7.3-W6 [mm]
  rect 2.224x3.42 smd: 1(0,0) 2(6.656,0)
  silkscreen extent -0.48,-3.35 6.93,3.45
MAXM-S8+4_M [mm] "SOIC, 8-Leads, Body 4.9x3.9mm, Pitch 1.27mm, IPC Low Density"
  oval 2.5x0.7 smd: 1(-2.45,1.905) 2(-2.45,0.635) 3(-2.45,-0.635) 4(-2.45,-1.905) 5(2.45,-1.905) 6(2.45,-0.635) 7(2.45,0.635) 8(2.45,1.905)
  silkscreen extent -2.57,-2.5 0.8,2.93, body extent -2,-2.5 2,2.5, height 1.75
MCRN-SOT23-5_V [mm] "SOT-23, 5-Leads, Body 3x1.7mm, Pitch 0.95mm"
  rect 1x0.66 smd: 1(-1.3,0.95) 2(-1.3,0) 3(-1.3,-0.95) 4(1.3,-0.95) 5(1.3,0.95)
  silkscreen extent -1.42,-1.5 0.4,1.95, body extent -1.5,-1.5 1.5,1.5, height 1.45
RELAY-TH_SRD-XXVDC-XL-C [mil]
  round 110 hole 60: 1(-200.79,-236.22) 2(279.53,-236.2) 3(279.53,236.2) 4(-200.79,236.22) 5(-279.53,0)
  silkscreen extent -342,-307 413,307
RESC1608X055N_0603 [mil] "Chip Resistor, 0603"
  round 10 on Mech3: 0(0,0)
  rect 40x30 smd: 1(-30.98,0) 2(30.98,0)
  silkscreen extent -30,-29 30,29, body extent -31,-16 31,16, height 22
SMB [mm]
  rect 2.2x2.8 smd: 1(0,0) 2(4.5,0)
  silkscreen extent -1.3,-1.8 5.8,1.8
so-8 [mil]
  rect 55x25 smd: 1(0,0)
  oval 55x25 smd: 2(0,-50) 3(0,-100) 4(0,-150) 5(226.38,-150) 6(226.38,-100) 7(226.38,-50) 8(226.38,0)
  silkscreen extent 43,-175 183,25
SO-8 [mil]
  rect 55x25 smd: 1(0,0)
  oval 55x25 smd: 2(0,-50) 3(0,-100) 4(0,-150) 5(226.38,-150) 6(226.38,-100) 7(226.38,-50) 8(226.38,0)
  silkscreen extent 43,-175 183,25
SOD323 [mm]
  rect 0.65x1.35 smd: 1(0,0) 2(2.4,0)
  silkscreen extent -0.03,-0.8 2.44,0.8
sop4 [mil]
  rect 80x30 smd: 1(0,0) 2(0,-100) 3(250,-100) 4(249,0)
  silkscreen extent 76,-125 176,21
SOP16-T [mm]
  rect 1.2x0.8 smd: 1(0,0) 2(0,-1.27) 3(0,-2.54) 4(0,-3.81) 5(0,-5.08) 6(0,-6.35) 7(0,-7.62) 8(0,-8.89) 9(6.3,-8.89) 10(6.3,-7.62) 11(6.3,-6.35) 12(6.3,-5.08) 13(6.3,-3.81) 14(6.3,-2.54) 15(6.3,-1.27) 16(6.3,0)
  silkscreen extent 1.41,-9.53 4.89,0.64
SOT23-3 [mm]
  rect 1x0.6 smd: 1(0,0) 2(0,2) 3(-2.5,1)
  silkscreen extent -2.1,-0.5 -0.5,2.5
sot-23-5 [mm]
  rect 1.2x0.5 smd: 1(-1.3,1) 2(-1.3,0) 3(-1.3,-1) 4(1.3,-1) 5(1.3,1)
  silkscreen extent -2.2,-1.7 2.2,1.7
TPD#1 [mm]
  round 1 smd: 1(0,0)
TPD#2 [mm]
  round 1 smd: 1(0.381,0)
TSSOP14 [mil]
  rect 66x14 smd: 1(-111,76.77) 2(-111,51.18) 3(-111,25.59) 4(-111,0) 5(-111,-25.59) 6(-111,-51.18) 7(-111,-76.77) 8(111,-76.77) 9(111,-51.18) 10(111,-25.59) 11(111,0) 12(111,25.59) 13(111,51.18) 14(111,76.77)
  silkscreen extent -88,-100 88,100
TY-100P [mm]
  round 1.8 hole 1.2: 1(0,0) 2(10.7,0) 3(10.7,-5.08) 4(0,-5.08)
  silkscreen extent -4.15,-8.08 14.86,2.96
TYPEC_16P [mm]
  oval 1x2.1 hole 0.65 slot 1.7 at 90 deg: 1(-4.32,3.759) 1(-4.32,-0.391) 1(4.32,3.759) 1(4.32,-0.391)
  round 0.67 hole 0.67: 2(-2.89,3.259) 2(2.89,3.259)
  rect 0.3x1 smd: A1(-3.05,4.293) A4(-2.25,4.293) A5(-1.25,4.293) A6(-0.25,4.293) A7(0.25,4.293) A8(1.25,4.293) A9(2.25,4.293) A12(3.35,4.293) B1(3.05,4.293) B4(2.55,4.293) B5(1.75,4.293) B6(0.75,4.293) B7(-0.75,4.293) B8(-1.75,4.293) B9(-2.55,4.293) B12(-3.35,4.293)
  silkscreen extent -4.45,-1.73 4.49,5.07
XA2.5-5P [mm] "间距2.5mm"
  rect 1.6x1.6 hole 1: 1(5,0)
  round 1.6 hole 1: 2(2.5,0) 3(0,0) 4(-2.5,0) 5(-5,0)
  silkscreen extent -7.5,-3.2 7.5,3.2
XA2.5-9P [mm] "间距2.5mm"
  rect 1.6x1.6 hole 1: 1(10,0)
  round 1.6 hole 1: 2(7.5,0) 3(5,0) 4(2.5,0) 5(0,0) 6(-2.5,0) 7(-5,0) 8(-7.5,0) 9(-10,0)
  silkscreen extent -12.5,-3.2 12.5,3.2
Φ10×10 [mm]
  oval 1.524x4 smd: 1(0,4.25) 2(0,-4.25)
  silkscreen extent -5.15,-5.71 5.15,6.35
可视开关电源保险丝座 [mm]
  round 3 hole 1.7: 1(0,0) 2(22.4,0)
  silkscreen extent -2.69,-4.86 24.98,4.64
插片端子4.8*0.8mm [mm] "4.8*0.8mm"
  round 2 hole 1.2: 1(0,0) 2(5.08,0)
  silkscreen extent -2.41,-1.91 7.74,1.91, body extent -0.58,-0.25 5.67,0.25, height 8.55

## Part data
C1 C2 C3 C4 C21: library part CAP
C5 C6 C8 C9 C10 C11 C20 C23 C25 C31 C32 C33 C34 C35 C36 C37: library part Cap, "Capacitor", LatestRevisionDate=17-Jul-2002, LatestRevisionNote="Re-released for DXP Platform.", PackageDescription="Radial Cap, Thru-Hole; 2 Leads; 0.3 in Pin Spacing", PackageReference=RAD-0.3, Published=8-Jun-2000, Publisher="Altium Limited"
C7 C68 C69: "Capacitor, MLCC", Manufacturer="Murata Electronics", Package=0603, PartNumber=GRM188R61A106KE69D, TempCo=[tempco], Tolerance=[tol], Voltage Rating=[voltage], ComponentLink1Description=Datasheet, SupplierDescription="CAP CER 10UF 10V X5R 0603"
C12 C13 C14 C15 C16 C17 C24 C60 C65 C66: "Capacitor, MLCC", Package=0603, PartNumber=C0603C104M5RACTU, TempCo=[tempco], Tolerance=[tol], Voltage Rating=[voltage], ComponentLink1Description=Datasheet, SupplierDescription="CAP CER 0.1UF 50V X7R 0603"
C18 C41 C42 C49 C56 C58 C62: library part Capacitor_0603, Package=0603, PartNumber=CC0603KRX7R9BB104, TempCo=[tempco], Tolerance=[tol], Voltage Rating=[voltage]
  C18 C41 C42 C49 C56 C58: SupplierDescription="CAP CER 0.1UF 50V X7R 0603"
  C62: SupplierDescription="CAP CER 10000PF 50V X7R 0603"
C19 C51 C52 C54: library part Capacitor_1206, Package=1206, PartNumber=GRM31CR61E476ME44L, TempCo=[tempco], Tolerance=[tol], Voltage Rating=[voltage], SupplierDescription="CAP CER 100UF 10V X5R 1206"
C38 C39: library part CAP, "Capacitor"
C40 C55: library part Capacitor_0603, Package=0603, PartNumber=0603B103K500NT, TempCo=[tempco], Tolerance=[tol], Voltage Rating=[voltage], SupplierDescription="CAP CER 10000PF 50V X7R 0603"
C43 C57: library part Capacitor_0603, Package=0603, PartNumber=CL10A105KB8NNNC, TempCo=[tempco], Tolerance=[tol], Voltage Rating=[voltage], SupplierDescription="CAP CER 1UF 25V X5R 0603"
C44: "Capacitor, MLCC", Manufacturer="Murata Electronics", Package=10uF, PartNumber=GRM188R61A106KE69D, TempCo=[tempco], Tolerance=[tol], Voltage Rating=[voltage], ComponentLink1Description=Datasheet, SupplierDescription="CAP CER 10UF 10V X5R 0603"
C45: library part "Cap Pol1", "Polarized Capacitor (Radial)", LatestRevisionDate=17-Jul-2002, LatestRevisionNote="Re-released for DXP Platform.", PackageReference=RB7.6-15, Published=8-Jun-2000, Publisher="Altium Limited"
C50: library part Capacitor_1206, Package=1206, PartNumber=CL31A106KBHNNNE, TempCo=[tempco], Tolerance=[tol], Voltage Rating=[voltage], SupplierDescription="CAP CER 10UF 25V X5R 1206"
C61: library part Capacitor_0805, Package=0805, PartNumber=CL21A106KBYQNNE, TempCo=[tempco], Tolerance=[tol], Voltage Rating=[voltage], SupplierDescription="CAP CER 10UF 10V X5R 0805"
C63: library part Capacitor_0805, Package=0805, PartNumber=CL21A226MAYNNNE, TempCo=[tempco], Tolerance=[tol], Voltage Rating=[voltage], SupplierDescription="CAP CER 22UF 10V X5R 0805"
C64 C71 C72 C73: library part Capacitor_0603, "Capacitor, MLCC", Manufacturer=muRata, Package=0603, PartNumber=GQM2195C2E4R7CB12J, TempCo=[tempco], Tolerance=[tol], Voltage Rating=[voltage], ComponentLink1Description=Datasheet, SupplierDescription="CAP CER 1nF 50V X7R 0603"
C67: "Capacitor, MLCC", Manufacturer=KEMET, Package=0603, PartNumber=C0603C104M5RACTU, TempCo=[tempco], Tolerance=[tol], Voltage Rating=[voltage], ComponentLink1Description=Datasheet, SupplierDescription="CAP CER 0.1UF 50V X7R 0603"
C70: "Capacitor, MLCC", Manufacturer="Murata Electronics", Package=0402, PartNumber=GRM155R71C104KA88J, TempCo=[tempco], Tolerance=[tol], Voltage Rating=[voltage], ComponentLink1Description=Datasheet, SupplierDescription="CAP CER 0.1UF 16V X7R 0402"
D1: Minimum Operating Temperature=-65C, Package / Case=SOD-323, Package Description="2-Pin Surface Mount Device, Body 1.7 x 1.3 mm", Package Reference=SOD323-2, Pd - Power Dissipation=200mW, Voltage Temperature Coefficient=0.25mV/C, Voltage Tolerance=5%, Vz - Zener Voltage=12V, Zener Current=5mA, Mounting Style=SMD/SMT, Mounting Technology=SurfaceMount, Package URL=http://www.vishay.com/docs/71192/71192.pdf, Packaging=Reel, Product Category=ZenerDiodes, RoHS=True, Series=BZT52C12, Termination Style=SMD/SMT, Unit Weight=0.000173oz, Width=1.4mm, Zz - Zener Impedance=40Ohms
D2 D3 D4: library part "DIODE S"
D5 D14 D18 D19 D20 D21: library part SMAJ12CA, "Transient Voltage Suppression Diode, 400 W, 33 V, -65 to 150 degC, 2-Pin SMD, RoHS, Tape and Reel", Manufacturer=Littelfuse, Package Description="2-Pin Surface Mount Device, Body 4.295 x 2.595 mm", Package Reference=DO-214AC, Power Dissipation=400W, Manufacturer URL=http://www.littelfuse.com/, Mounting Technology=SurfaceMount, PartNumber=SMBJ400CA
D6 D7: library part Diode, "Default Diode", Code_JEDEC=DO-214-AB, LatestRevisionDate=17-Jul-2002, LatestRevisionNote="Re-released for DXP Platform.", PackageReference=SMC, PackageVersion=Sep-1996, Published=8-Jun-2000, Publisher="Altium Limited"
D8 D9 D10 D11 D12 D13 D15 D16 D17: "VISHAY,LL4148,圆柱体MiniMELF100V/2A,ROHS", 制造商=VISHAY, 名称=快速开关二极管, 版本=V1.00, 物料编号=APLLY
F1: library part FBC0603, "Ferrite Bead Chip", Manufacturer="Pulse Electronics Network", PartNumber=BSMD1812-110-24V
F2 FB1 FB3: library part FBC0603, "Ferrite Bead Chip", Manufacturer="Pulse Electronics Network"
  F2: PartNumber=BSMD1812-110-24V
  FB1 FB3: PartNumber=PE-0603PFB121ST, SupplierDescription="FERRITE BEAD 600 OHM 0603 1LN"
FB2: library part FB, FB=BLM18BD102SN1(muRata), Part Field 1="磁珠/0603/1K ohm/100MHz", Text Field1=FB
L1 L2: library part 1276AS-H-100M=P2, "Metal alloy Power Inductor, 10 uH, ±20%, 1210 (3225)", PartNumber=SMMS0420-100M
P2: "Header, 9-Pin", LatestRevisionDate=17-Jul-2002, LatestRevisionNote="Re-released for DXP Platform.", Publisher="Altium Limited"
P3: "Header, 10-Pin, Dual row", LatestRevisionDate=17-Jul-2002, LatestRevisionNote="Re-released for DXP Platform.", Publisher="Altium Limited"
P5 P6 P7 P13: "Header, 4-Pin", LatestRevisionDate=17-Jul-2002, LatestRevisionNote="Re-released for DXP Platform.", Publisher="Altium Limited"
P8 P9 P12: "Header, 5-Pin", LatestRevisionDate=17-Jul-2002, LatestRevisionNote="Re-released for DXP Platform.", Publisher="Altium Limited"
P10 P14: "Header, 2-Pin", LatestRevisionDate=17-Jul-2002, LatestRevisionNote="Re-released for DXP Platform.", Publisher="Altium Limited"
Q1 Q3 Q4: library part NPN_MMBT3904
Q2: library part NPN, "NPN Bipolar Transistor", Code_JEDEC=TO-226-AA, LatestRevisionDate=17-Jul-2002, LatestRevisionNote="Re-released for DXP Platform.", PackageReference=TO-226, Published=8-Jun-2000, Publisher="Altium Limited"
Q6 Q8 Q9 Q10 Q11 Q12: library part BUK92150-55A, "BUK92150-55A", ComponentLink1Description="Manufacturer Link", ComponentLink1URL=http://www.vishay.com/, ComponentLink2Description=Datasheet, ComponentLink2URL=http://www.vishay.com/docs/70192/70192.pdf, DatasheetVersion=6-Oct-1997, LatestRevisionDate=17-Jul-2002, LatestRevisionNote="Re-released for DXP Platform.", PackageDescription="SOT-457/SC-74; 6 Leads; Body 3.1 x 3 mm, inc. leads (LxW max)", PackageReference=TSOP-6, PackageVersion=Aug-1998, Published=8-Jun-2000, Publisher="Altium Limited"
Q7: library part PUT, "Programmable Unijunction Transistor", LatestRevisionDate=17-Jul-2002, LatestRevisionNote="Re-released for DXP Platform.", PackageReference=TO-52, Published=8-Jun-2000, Publisher="Altium Limited"
R1 R19 R20 R22 R23 R25 R26 R27 R28 R29 R30 R31 R32 R33 R34 R35 R36 R37 R40 R41 R42 R43: library part Res0805M
R2 R3 R57 R58 R59 R60 R61 R62 R63 R65 R66 R67 R68 R69: library part R
R4 R15 R16 R17 R49 R50 R75 R77: "Resistor, Standard", Package=0603, PartNumber=RC0603FR-0710KL, TempCo=[tempco], Tolerance=tol, ComponentLink1Description=Datasheet, SupplierDescription="RES SMD 10K OHM 1% 1/10W 0603"
R5 R47 R48: library part RES0603, ID=233, 制造商=三星/YAGEO, 参数值=1.00E+04, 器件等级=——, 工作温度="–55°C to 155°C", 序号=109, 物料主编码(PN)=150000040, 物料名称=贴片电阻, 物料描述=RES,贴片电阻,0603,10k,±1%,1/10W,1.6X0.8X0.45mm,RC1608F103CS/RC0603FR-0710KL, 物料类型=表贴电阻, 精度=±1%, 规格型号(完整型号)=RC1608F103CS/RC0603FR-0710KL
R6 R7 R8 R9 R12 R13 R82 R83 R84 R85: library part Res1, "Resistor", LatestRevisionDate=17-Jul-2002, LatestRevisionNote="Re-released for DXP Platform.", PackageReference=AXIAL-0.3, Published=8-Jun-2000, Publisher="Altium Limited"
R18 R46 R76: "Resistor, Standard", Package=0603, PartNumber=RC0603FR-07100RL, TempCo=[tempco], Tolerance=tol, ComponentLink1Description=Datasheet, SupplierDescription="RES SMD 100 OHM 1% 1/10W 0603"
R21: "Resistor, Standard", Package=0603, PartNumber=RR0816P-103-D, TempCo=[tempco], Tolerance=tol, ComponentLink1Description=Datasheet, SupplierDescription="RES SMD 10K OHM 0.5% 1/16W 0603"
R24 R38 R39 R92 R93 R94: library part Res2, "Resistor", LatestRevisionDate=17-Jul-2002, LatestRevisionNote="Re-released for DXP Platform.", PackageReference=AXIAL-0.4, Published=8-Jun-2000, Publisher="Altium Limited"
R44 R45: library part RES2
R51 R52 R53 R54: library part Resistor_0603, Package=0603, Power Rating=[power], TempCo=[tempco], Tolerance=tol
  R51 R53: SupplierDescription="RES SMD 75K OHM 1% 1/10W 0603"
  R52 R54: SupplierDescription="RES SMD 10K OHM 1% 1/10W 0603"
R55: library part Resistor_0603, Package=0603, PartNumber=RC0603FR-0733KL, Power Rating=[power], TempCo=[tempco], Tolerance=tol, SupplierDescription="RES SMD 33K OHM 1% 1/10W 0603"
R56: library part Resistor_0603, Package=0603, PartNumber=RC0603FR-0710KL, Power Rating=[power], TempCo=[tempco], Tolerance=tol, SupplierDescription="RES SMD 10K OHM 1% 1/10W 0603"
R64: library part Resistor_0603, "Resistor, Standard", Manufacturer=Yageo, Package=0603, PartNumber=RC0603FR-0710KL, Power Rating=[power], TempCo=[tempco], Tolerance=tol, ComponentLink1Description=Datasheet, SupplierDescription="RES SMD 10K OHM 1% 1/10W 0603"
RLY1 RLY2: Coil Rated Power=360mW, Coil Resistance=70Ω, Coil Voltage=5V, Contact Rating=-, Contact Resistance=100mΩ, JLCPCB Part Class="Extended Part", LCSC Part Name=蓝色, Manufacturer=松乐, Maximum Switching Current=15A, Maximum Switching Voltage=250V@AC, Add into BOM=yes, Coil Type=无极性-单线圈, Contact Form=一组转换:1C(单刀双掷-转换), Convert to PCB=yes, Datasheet=https://atta.szlcsc.com/upload/public/pdf/source/20200305/C490149_C96E4098A3B1FFB377D5AD2E40B7C2A8.pdf, Device=SRD-05VDC-SL-C, Manufacturer Part=SRD-05VDC-SL-C, Operate Time=10ms, Pin Number=5, Release Time=10ms, Supplier=LCSC, Supplier Footprint=插件,15.6x19.2mm, Supplier Part=C35449, Symbol=SRD-05VDC-SL-C
SC1: library part "Cap Pol2", "Polarized Capacitor (Axial)", LatestRevisionDate=17-Jul-2002, LatestRevisionNote="Re-released for DXP Platform.", PackageReference=POLAR0.8, Published=8-Jun-2000, Publisher="Altium Limited"
U3: library part ME6119C50M5G, "High Speed LDO Regulators, Low ESR, 5.0 V, 400 mA, -40 to 125 degC, 5-Pin SOT-23, RoHS, Tape and Reel", Case\/Package=SOT-23, Dropout Voltage=160mV, Max Input Voltage=5.5V, Max Operating Temperature=125degC, Min Current Limit=400mA, Min Input Voltage=2.5V, Min Operating Temperature=-40degC, Nominal Output Voltage=3.3V, Output Current=300mA, Package Description="5-Pin Small Outline Transistor, Body 1.6 x 2.9 mm, Pitch 0.95 mm", Datasheet URL=http://ww1.microchip.com/downloads/en/DeviceDoc/MIC550X.pdf, Datasheet Version="Rev. 2.3, 04/2015", Lead Free=LeadFree, Manufacturer URL=http://www.microchip.com/, Mount=SurfaceMount, Mounting Technology=SurfaceMount, Number of Pins=5, Number of Regulators=1, Output Voltage=3.3V, Package Reference=SOT-23, Packaging=CutTape, REACH SVHC=NoSVHC, RoHSCompliant=True
U4: library part AD8615
U5: library part MAX908EPD, "Quad High-speed, Ultra Low-power, Single-Supply TTL comparator", Code_JEDEC=MS-001-AC, ComponentLink1Description="Manufacturer Link", ComponentLink1URL=http://www.maxim-ic.com/, ComponentLink2Description=Datasheet, ComponentLink2URL=http://pdfserv.maxim-ic.com/en/ds/MAX907-MAX909.pdf, DatasheetVersion=Jul-1994, LatestRevisionDate=29-May-2009, LatestRevisionNote="Component Body Added.", PackageDescription="DIP, 14-Pin, Row Spacing 7.62 mm, Pitch 2.54 mm", PackageReference=PD14, PackageVersion="RevB, 21-0043", Published=16-Jan-2001, Publisher="Altium Limited"
U7 U8: library part TLP281-4
U9 U10: library part Optoisolator1, "4-Pin Phototransistor Optocoupler", DatasheetVersion=Nov-2003, LatestRevisionDate=04-Mar-2005, LatestRevisionNote="Sch pins 3 & 4 Swapped.", PackageReference=DIP-4, Published=24-Mar-1999, Publisher="Altium Limited"
U11: "Low-Noise FET-Input Operational Amplifier, 4.5 V to 40 V,  -40 to 125 degC, 5-Pin SOT-23 (DBV), Green (RoHS & no Sb/Br), Tape and Reel", ComponentLink1Description="Manufacturer URL", PartNumber=TL071HIDBVR
U12: library part ADS1118IDGSR_C55347, Symbol=ADS1118IDGSR_C55347
U13 U14 U24: library part MAX33071EASA+, "RS-485 Half-Duplex Transceiver with ±65V Fault Protection,+3V to +5.5V, -40 to 125 degC, 8-Pin SOIC (S8+4), RoHS, Tube", ComponentLink1Description="Manufacturer URL", ComponentLink1URL=http://www.maximintegrated.com/, ComponentLink2Description=Datasheet, ComponentLink2URL=https://datasheets.maximintegrated.com/en/ds/MAX33070E-MAX33071E.pdf, PartNumber=MAX33071EASA+, VIN="3.2 to 12.6 V", VOUT="3.000 V"
U17: Min Operating Temperature="-40 degC", Package Quantity=1, Resistance="50 Ohm", Mount="Surface Mount", PackageDescription="6-Pin Small Outline Transistor, Body 2.9 x 1.6 mm, Pitch 0.95 mm", PackageReference=DDC0006A, Packaging="Cut Tape", PartNumber=TPS562201DDCR, Pins=5, RoHSCompliant=true, Shielding=Unshielded, Width="1.01 mm"
U28 U29: JLCPCB Part Class="Extended Part", LCSC Part Name="POGO PIN弹簧顶针 贴片连接器", Manufacturer=YIYUAN(怡远), Rated Current=2.5A, Rated Voltage=12V, Add into BOM=yes, Comment_1=YTC1P-3015-01, Contact Material=黄铜, Contact Plating=金, Convert to PCB=yes, Datasheet=https://atta.szlcsc.com/upload/public/pdf/source/20221031/BD070516233C1C93A35D01CFB419D0D5.pdf, Device=YTC1P-3015-01, Manufacturer Part=YTC1P-3015-01, Number of Pins=单PIN位, Overall Length/Height=4.5mm, Supplier=LCSC, Supplier Footprint=-, Supplier Part=C5221293, Symbol=YTC1P-3015-01, Type="弹簧顶针(POGO PIN)"
X1: library part XTAL, "Crystal Oscillator", LatestRevisionDate=17-Jul-2002, LatestRevisionNote="Re-released for DXP Platform.", PackageReference=R38, Published=8-Jun-2000, Publisher="Altium Limited"
Y1: library part XTAL
P1 P4: Publisher="Altium Limited"
Q5: Symbol=AGM609MNA
U2: Symbol=DAC8551IADGKR
U15 U16: PartNumber=LMR36520FADDAR, Publisher="Bolgen Studio"
U18: Symbol=DRV8306HRSMR

## Free pads (board coordinates)
  oval 1.5x12 hole 1.5 slot 12 at 90 deg unplated: 1(91.389,83.439) 1(91.389,97.434)
  oval 20x1.5 hole 1.5 slot 20 at 45 deg unplated rot 45: 1(100.914,112.471)
  oval 16x1.5 hole 1.5 slot 16 at 0 deg unplated: 1(101.397,77.241)
  oval 12x1.5 hole 1.5 slot 12 at 0 deg unplated: 1(116.332,121.615) 1(130.378,121.615)
  oval 1.5x20 hole 1.5 slot 20 at 90 deg unplated: 1(144.526,36.059) 1(144.526,58.03)
  oval 1.5x15 hole 1.5 slot 15 at 90 deg unplated: 1(144.526,77.597)
  round 3.3 hole 3.3 unplated: 2(15.055,18.984) 2(15.055,128.984) 2(51.281,19.558) 2(51.281,46.355) 2(80.055,18.984) 2(80.055,128.984) 2(92.202,19.558) 2(92.202,46.355) 2(145.055,18.984) 2(145.055,128.984) 2(145.055,198.984) 2(180.055,53.984)
  round 9 hole 9 unplated: 2(179.805,30.484)

## Via types
v1: diameter 0.762, hole 0.457, Top Layer to Bottom Layer, tented both sides, 554 vias
v2: diameter 0.61, hole 0.305, Top Layer to Bottom Layer, tented both sides, 99 vias
v3: diameter 0.45, hole 0.25, Top Layer to Bottom Layer, tented both sides, 70 vias
v4: diameter 1.27, hole 0.711, Top Layer to Bottom Layer, tented both sides, 1 vias

## Nets (pads, with @x,y where several pads share a name; then routed paths per layer and width w, separated by ;. In a path a pad name is that pad's centre, name@x,y a point inside that pad or via, vN(x,y) a via of type N, cw(c..) or ccw(c..) an arc to the next point about the centre after c; other vN are vias at no path point)
3.3V_ISO: C12.1 C13.1 C14.1 C15.1 C16.1 C17.1 C60.1 C66.1 C69.1 C70.1 FB2.1 R4.2 R15.2 R16.2 R17.2 R27.1 R29.1 R31.1 R33.1 R35.1 R37.1 R41.1 R44.2 R45.2 R75.2 R82.1 U2.1 U3.5 U4.5 U13.8 U24.8 | length 455.2
  Top Layer w0.33: U2.1@33.325,131.068 33.325,130.175 v1(34.239,129.261)
  Top Layer w0.508: R15.2@36.83,130.175 36.83,131.475
  Top Layer w0.762: FB2.1@20.674,97.662 20.674,96.573 24.409,92.837 34.392,92.837 35.65,91.578 R29.1@35.65,89.443 ; v1(36.862,125.977) C15.1@36.862,127.254 C14.1@36.862,128.524 ; v1@37.084,65.659 v1(37.088,65.655) ; 37.379,38.548 38.1,37.827 37.398,37.125 ; 37.405,55.204 38.125,54.483 37.424,53.781 ; 37.516,37.846 37.535,37.827 R44.2@42.037,37.827 ; 37.516,54.61 37.643,54.483 R45.2@42.037,54.483 ; 56.21,20.345 56.492,20.064 58.111,20.064 ; v1(60.833,89.129) R75.2@60.833,109.068 59.715,109.068 v1(59.69,109.093) 59.233,109.55 59.233,124.054 59.868,124.689 C66.1@60.706,124.689 C60.1@62.611,124.689 U24.8@62.611,120.179 ; R4.2@66.065,106.807 v1(67.437,106.807) ; v1(67.31,89.027) 67.31,95.809 105.156,133.655 124.231,133.655 127.914,137.338 127.914,176.157 130.447,178.689 132.334,178.689 134.874,178.689 ; R82.1@81.788,78.232 82.296,78.74 82.296,79.915 82.391,80.01 83.185,80.01 83.566,80.391 83.566,87.833 v1(82.22,89.179) ; U3.5@125.252,19.873 125.252,19.875 C70.1@129.413,19.875 ; R17.2@129.643,25.908 v1(130.861,25.908)
  Top Layer w1.016: R29.1@35.652,89.445 35.65,89.443 R35.1@35.65,65.659 v1@37.084,65.659 ; v1(37.516,58.242) 37.516,54.61 37.516,37.846 37.516,29.718 43.282,23.952 52.603,23.952 56.21,20.345 56.21,14.834 57.556,13.487 v1(69.621,13.487)
  Bottom Layer w0.762: v1@37.084,65.659 v1(37.088,65.655) ; v1(59.69,109.093) 65.151,109.093 v1(67.437,106.807)
  Bottom Layer w1.016: v1(35.662,88.367) 50.241,88.367 50.99,89.115 82.156,89.115 v1(82.22,89.179) ; v1(37.088,65.655) 37.516,65.227 v1(37.516,58.242) ; v1(69.621,13.487) 93.565,13.487 99.966,19.888 v1(126.492,19.888)